# Altium PCB InstallGuide.PcbDoc (part 1 of 2)
Units mil, origin at the board's own origin, x right, y up, seen from the top; angles counter-clockwise.
Board outline 6000 x 4000 mil, 2 copper layers (Top Layer, Bottom Layer); 26 components, 17 nets, 116 pads, 67 vias.
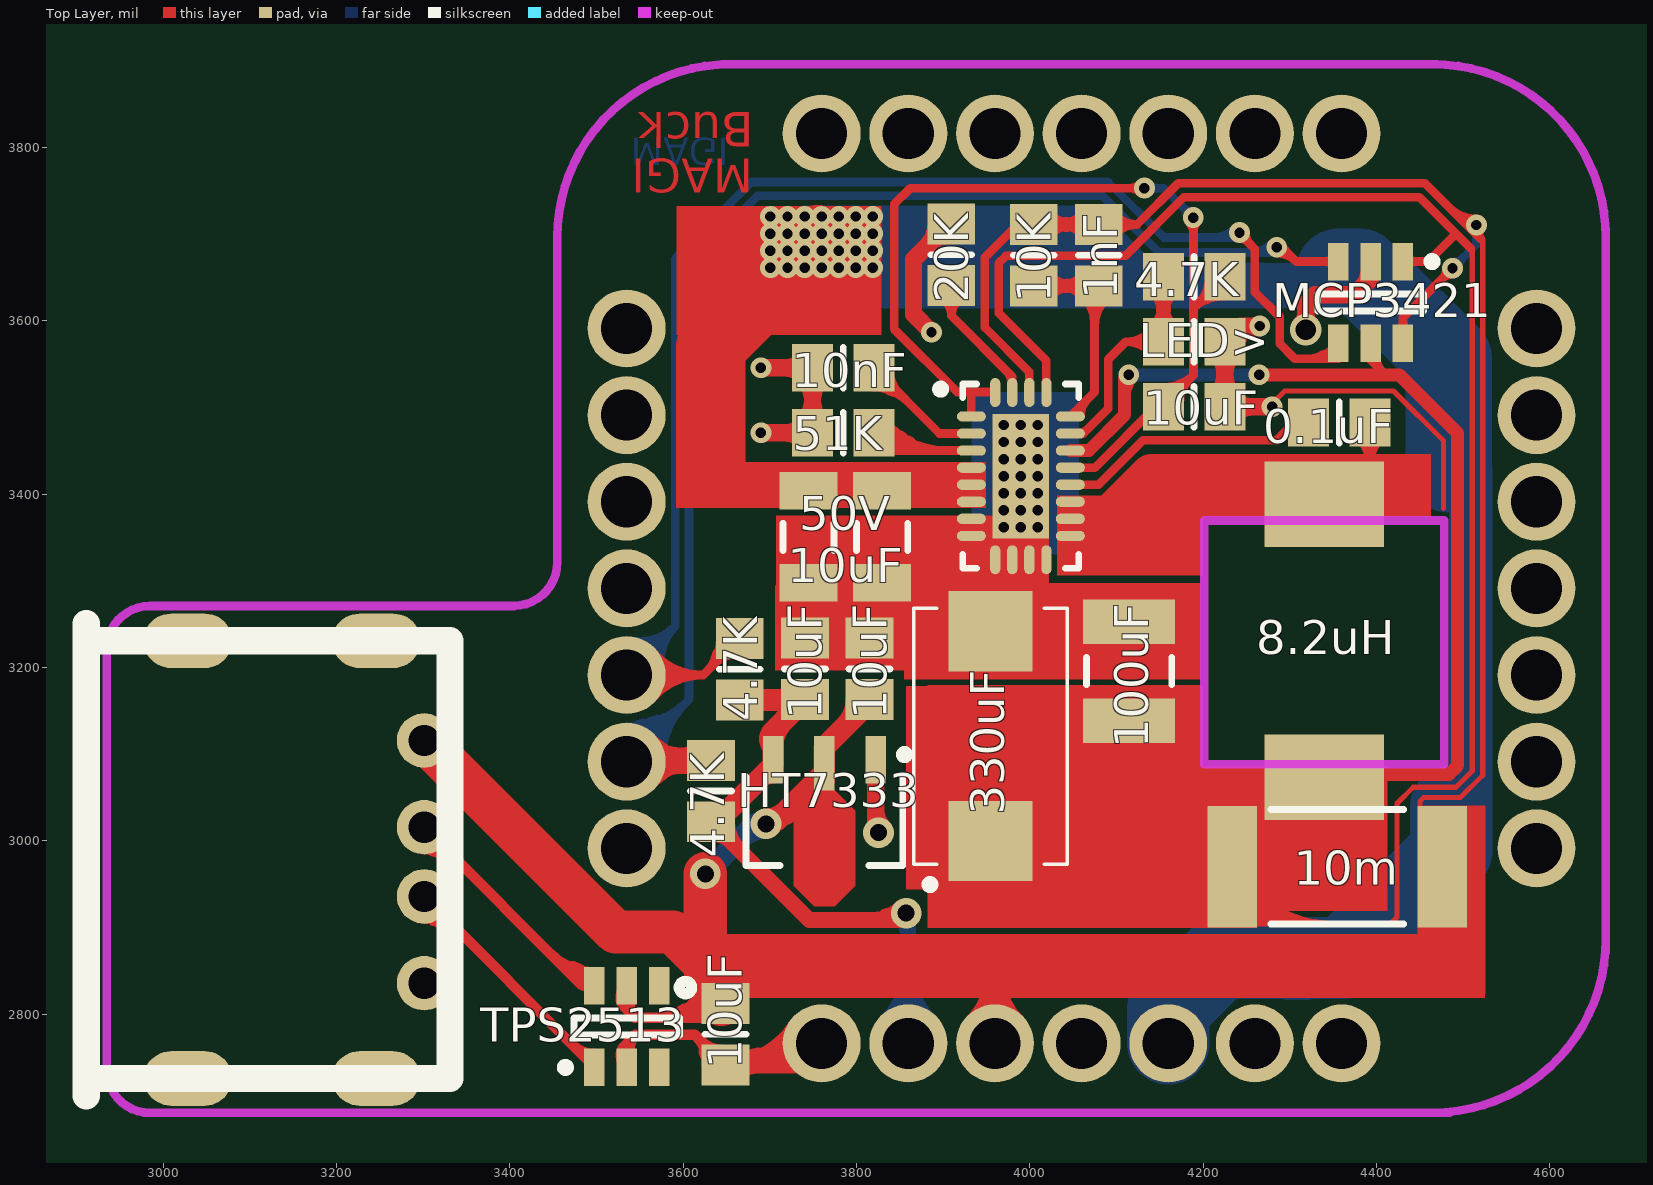
[diagram p0: Top Layer view]
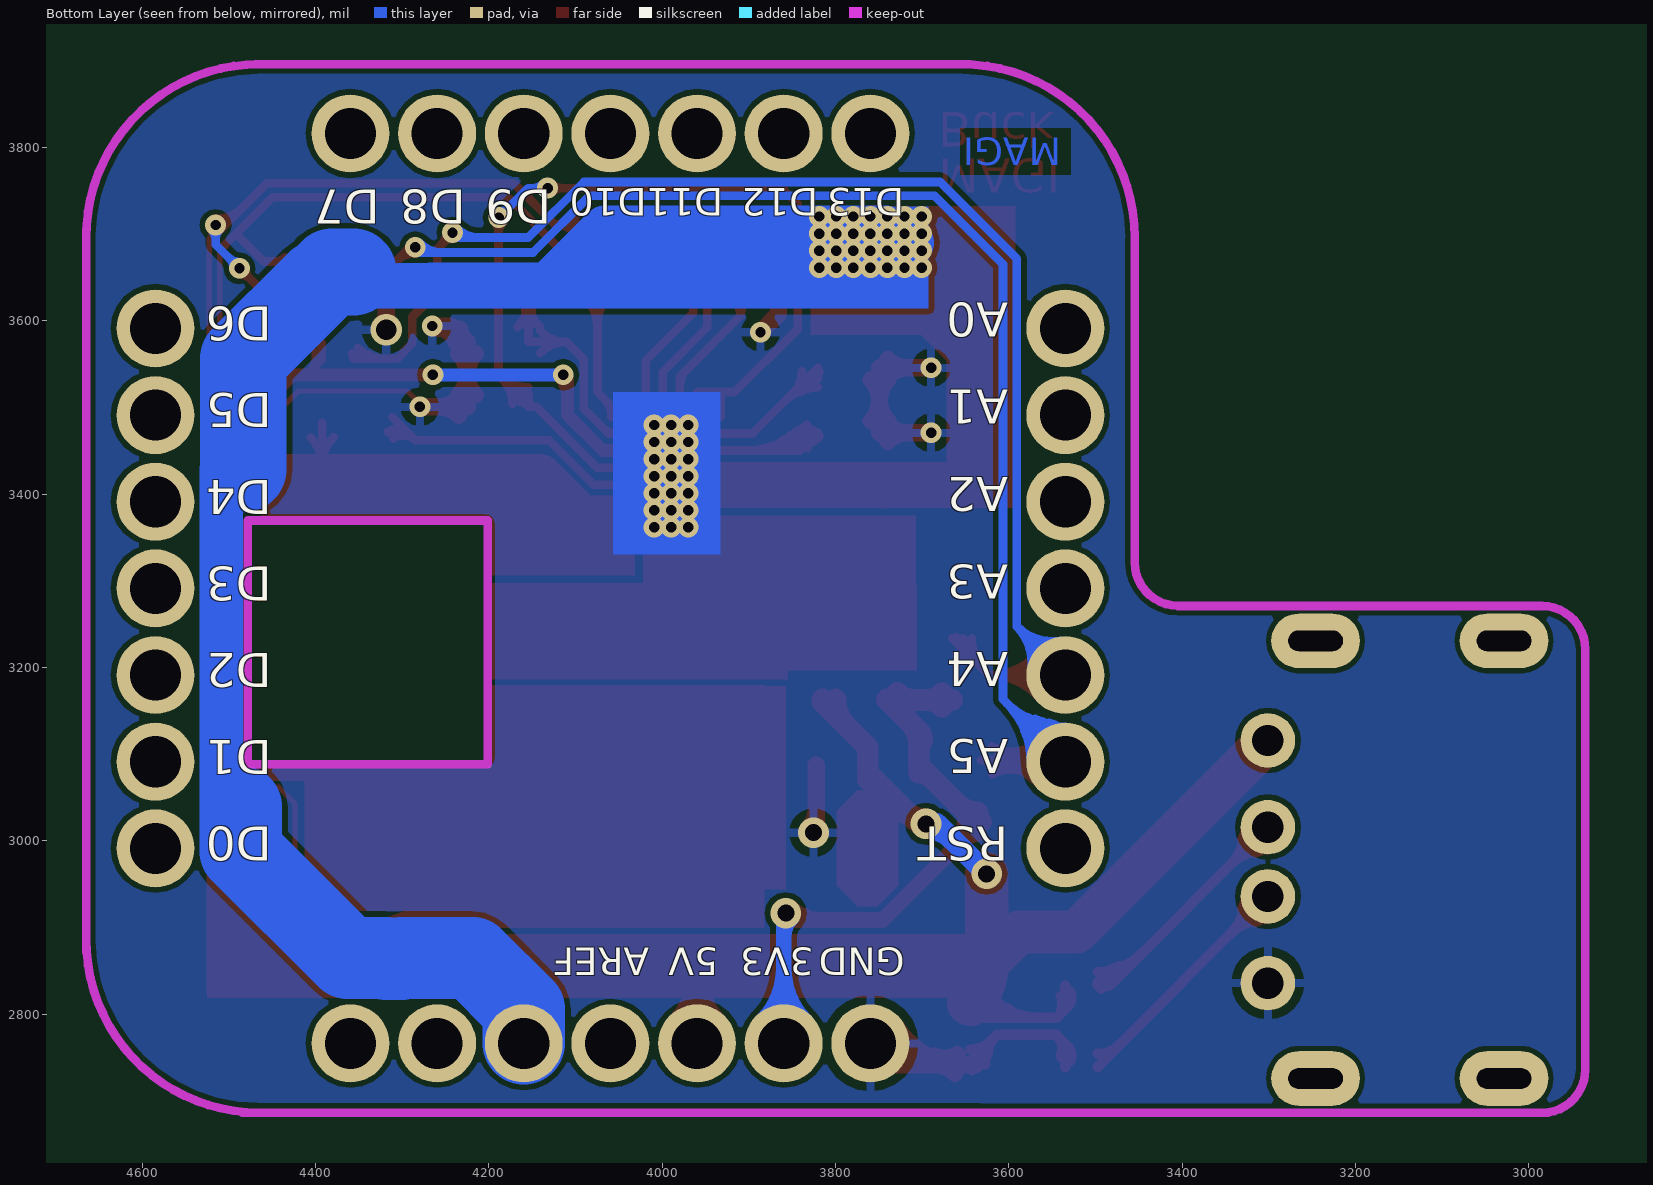
[diagram p1: Bottom Layer view, seen from below]

## Layer stack, top to bottom
Top Solder: solder mask 0.4, Solder Resist, Dk 3.5
Top Layer: signal copper 1.4
Dielectric 1: dielectric 12.6, FR-4, Dk 4.8
Bottom Layer: signal copper 1.4
Bottom Solder: solder mask 0.4, Solder Resist, Dk 3.5

## Board outline
1000,1000 7000,1000 7000,5000 1000,5000

## Design rules (kind name [scope] priority, off if disabled: settings)
Clearance [All] p1: gap=6
PolygonConnect [All] p1: connectstyle=Relief reliefconductorwidth=10 reliefentries=4 polygonreliefangle="90 Angle" airgapwidth=10
RoutingVias [All] p1: holewidth=28 width=50 viastyle="Through Hole" minholewidth=12 minwidth=24 maxholewidth=280 maxwidth=500
SolderMaskExpansion [All] p1: expansion=4
Width [All] p1: maxlimit=100 minlimit=6 preferedwidth=10
29 further rules are at their usual default settings.

## Components (designator, comment, footprint, x,y, rotation, side; value= is the part's Value field where it differs from the comment)
C1 "0805" 6-0805_N 4189.72,3500.87 r180 top
C2 "0805" 6-0805_N 3784.72,3545.87 r180 top
C3 "0805" 6-0805_N 4079.72,3675.87 r270 top
C4 "1206" C1206 3744.72,3350.87 r90 top
C5 "1206" C1206 3829.72,3350.87 r90 top
C6 "0805" 6-0805_N 4357.09,3482.68 r180 top
C7 "CAP_1" 6TPE330M 3954.72,3120.87 r90 top
C8 "0805" C1210_N 4114.72,3195.87 r90 top
C9 "10uf" 6-0805_n 3815.04,3198.5 r90 top
C10 "10uf" 6-0805_n 3740.63,3198.5 r90 top
C11 "10uf" 6-0805_N 3648.82,2776.77 r270 top
D1 "LED_0805" 6-0805_n 4189.72,3575.87 r0 top
J1 "MAGIsBoard" MAGIsBoard 4059.84,3291.34 r180 top
J2 "USB1" USB-04A 3273.62,2978.35 r270 top
L1 "Inductor" 7*7 4349.72,3230.87 r270 top
R1 "RES1_1" 6-0805_n 3909.53,3676.46 r90 top
R2 "RES1_1" 6-0805_n 3784.72,3470.87 r180 top
R3 "RES1_1" 6-0805_n 4004.72,3675.87 r270 top
R4 "RES1_1" 2512 4354.8,2970.16 r0 top
R5 "RES1_1" 6-0805_n 4189.72,3650.87 r180 top
R6 "RES1_1" 6-0805_n 3632.28,3057.48 r270 top
R7 "RES1_1" 6-0805_n 3665.35,3198.03 r270 top
U1 "LT8697" lt8697 3989.72,3420.87 r0 top
U2 "HS7333" HS7333 3762.99,3022.83 r270 top
U3 "TPS2513" TPS2513 3535.04,2785.83 r90 top
U4 "MCP3421" tps2513 4393.31,3621.26 r270 top

## Footprints (in the part's own frame and the unit in brackets; to place one, negate y for a bottom-side part, rotate by r counter-clockwise, add the part's x,y. Pads: shape width x height; smd on the part's side, far side on the other; paste and mask are expansions set on the pad)
6-0805_N [mm] "Chip Resistor, Body 2.0x1.2mm, IPC Medium Density"
  rect 1.2x1.4 smd: 1(-0.9,0) 2(0.9,0)
  silkscreen extent 0,-0.6 0,0.6, body extent -1.07,-0.7 1.07,0.7, height 0.7
6-0805_n [mm] "Chip Resistor, Body 2.0x1.2mm, IPC Medium Density"
  rect 1.2x1.4 smd: 1(-0.9,0) 2(0.9,0)
  silkscreen extent 0,-0.6 0,0.6, body extent -1.07,-0.7 1.07,0.7, height 0.7
6TPE330M [mm] "Molded Capacitor, 2-Leads, Body 7.30x4.30mm, IPC Medium Density"
  rect 2.35x2.45 smd: 1(-3.075,0) 2(3.075,0)
  silkscreen extent -4.47,-2.25 3.75,2.25, body extent -3.75,-2.25 3.75,2.25, height 2
7*7 [mil]
  rect 98.43x137.8 smd: 1(-157.5,-10) 2(157.5,-10)
2512 [mm]
  rect 1.45x3.55 smd: 1(-3.075,0) 2(3.075,0)
  silkscreen extent -1.95,-1.68 1.95,1.68, body extent -3.22,-1.7 3.22,1.7, height 0.65
C1206 [mm] "Chip Capacitor, Body 3.2x1.6mm, IPC High Density"
  rect 1.1x1.7 smd: 1(-1.35,0) 2(1.35,0)
  silkscreen extent -0.4,-0.75 0.4,0.75, body extent -1.7,-0.9 1.7,0.9, height 1.3
C1210_N [mm] "Chip Capacitor, Body 3.2x2.5mm, IPC Medium Density"
  rect 1.3x2.7 smd: 1(-1.45,0) 2(1.45,0)
  silkscreen extent -0.4,-1.25 0.4,1.25, body extent -1.7,-1.35 1.7,1.35, height 1.5
HS7333 [mm] "SOT89, 3-Leads, Body 4.50x2.50mm, Pitch 1.50mm, Lead Span 4.1mm, IPC Medium Density"
  rect 1.4x0.6 smd: 1(-1.8,1.5) 3(-1.8,-1.5)
  rect 1.6x0.6 smd: 2(-1.7,0)
  Top Layer region: -0.9,0.3 -0.3,0.9 1.9,0.9 2.5,0.3 2.5,-0.3 1.9,-0.9 -0.3,-0.9 -0.9,-0.3
  silkscreen extent -2.07,-2.3 1.3,2.48, body extent -1.3,-2.3 1.3,2.3, height 1.6
lt8697 [mm] "QFN, 24-Leads, Body 3.00x5.00mm, Pitch 0.50mm, Thermal Pad 1.65x3.65mm, IPC Medium Density"
  oval 0.85x0.3 smd: 1(-1.45,1.75) 2(-1.45,1.25) 3(-1.45,0.75) 4(-1.45,0.25) 5(-1.45,-0.25) 6(-1.45,-0.75) 7(-1.45,-1.25) 8(-1.45,-1.75) 13(1.45,-1.75) 14(1.45,-1.25) 15(1.45,-0.75) 16(1.45,-0.25) 17(1.45,0.25) 18(1.45,0.75) 19(1.45,1.25) 20(1.45,1.75)
  oval 0.3x0.85 smd: 9(-0.75,-2.45) 10(-0.25,-2.45) 11(0.25,-2.45) 12(0.75,-2.45) 21(0.75,2.45) 22(0.25,2.45) 23(-0.25,2.45) 24(-0.75,2.45)
  rect 1.65x3.65 smd: 25(0,0)
  silkscreen extent -2.47,-2.7 1.7,2.7, body extent -1.55,-2.55 1.55,2.55, height 0.8
MAGIsBoard [mil]
  round 90 hole 59.06: 1(300,525) 2(200,525) 3(100,525) 4(0,525) 5(-100,525) 6(-200,525) 7(-300,525) 8(-525,300) 9(-525,200) 10(-525,100) 11(-525,0) 12(-525,-100) 13(-525,-200) 14(-525,-300) 15(-300,-525) 16(-200,-525) 17(-100,-525) 18(0,-525) 19(100,-525) 20(200,-525) 21(300,-525) 22(525,-300) 23(525,-200) 24(525,-100) 25(525,0) 26(525,100) 27(525,200) 28(525,300)
  Keep-Out Layer lines w10: 605,-405 cw(c405,-405) 405,-605 ; 425,605 -425,605 ; 415,-605 -410,-605 ; -405,605 ccw(c-405,405) -605,405 ; -405,-605 cw(c-405,-405) -605,-405 ; -605,420 -605,290 -605,-415
  silkscreen extent 450,454 464,468
TPS2513 [mm]
  rect 1.1x0.6 smd: 1(-1.2,0.95) 2(-1.2,0) 3(-1.2,-0.95) 4(1.2,-0.95) 5(1.2,0) 6(1.2,0.95)
  silkscreen extent -1.32,-1.55 0.25,1.92, body extent -0.87,-1.52 0.87,1.53, height 1.45
tps2513 [mm]
  rect 1.1x0.6 smd: 1(-1.2,0.95) 2(-1.2,0) 3(-1.2,-0.95) 4(1.2,-0.95) 5(1.2,0) 6(1.2,0.95)
  silkscreen extent -1.32,-1.55 0.25,1.93, body extent -0.87,-1.52 0.87,1.53, height 1.45
USB-04A [mm]
  oval 1.6x2.6 hole 0.6 slot 1.6 at 90 deg: 0(-6.413,-0.699) 0(-6.413,-6.223) 0(6.413,-0.698) 0(6.414,-6.223)
  round 1.6 hole 0.92: 1(-3.492,0.698) 2(-0.953,0.698) 3(1.079,0.699) 4(3.619,0.699)
  silkscreen extent -6.92,-9.21 6.92,1.46

## Part data
C1 C2 C3 C4 C5 C6 C8: library part CAP_1, "Capacitor"
C7: "Capacitor"
C9 C10 C11: library part "CAPACITOR POL", "Capacitor"
D1: "LED"

## Via types
v1: diameter 24, hole 12, Top Layer to Bottom Layer, 62 vias
v2: diameter 35.43, hole 19.68, Top Layer to Bottom Layer, 4 vias
v3: diameter 36, hole 24, Top Layer to Bottom Layer, 1 vias

## Nets (pads, with @x,y where several pads share a name; then routed paths per layer and width w, separated by ;. In a path a pad name is that pad's centre, name@x,y a point inside that pad or via, vN(x,y) a via of type N, cw(c..) or ccw(c..) an arc to the next point about the centre after c; other vN are vias at no path point)
3.3V: C10.1 J1.2 R6.2 R7.2 U2.3 | length 2120
  Top Layer w18: R6.2@3632.28,3022.05 3745.67,2908.66 3849.6,2908.66 v2(3857.47,2916.53) ; R6.2@3636.22,3007.43 cw(c3636.22,2981.63) R6.2@3654.46,2999.87 ; R6.2@3636.22,3007.43 cw(c3636.22,2981.63) R6.2@3654.46,2999.87 ; R6.2@3636.22,3007.43 cw(c3636.22,2981.63) R6.2@3654.46,2999.87 ; R6.2@3650.84,3022.05 ccw(c3695.65,3022.05) 3663.97,2990.36 ; R6.2@3650.84,3022.05 ccw(c3695.65,3022.05) 3663.97,2990.36 ; R6.2@3650.84,3022.05 ccw(c3695.65,3022.05) 3663.97,2990.36 ; 3817.43,2908.66 ccw(c3817.43,2956.57) v2@3851.31,2922.69 ; 3817.43,2908.66 ccw(c3817.43,2956.57) v2@3851.31,2922.69 ; 3817.43,2908.66 ccw(c3817.43,2956.57) v2@3851.31,2922.69 ; 3834.04,2912.72 cw(c3841.15,2900.41) v2@3851.27,2910.4 ; 3834.04,2912.72 cw(c3841.15,2900.41) v2@3851.27,2910.4 ; 3834.04,2912.72 cw(c3841.15,2900.41) v2@3851.27,2910.4
  Top Layer w25: R6.2@3632.28,3022.05 3638.76,3022.05 3704.02,3087.3 3704.02,3126.46 ; R7.2@3665.35,3162.6 C10.1@3740.16,3162.6 ; C10.1@3740.63,3163.07 C10.1@3740.16,3162.6 ; R6.2@3636.22,3033.17 ccw(c3636.22,3066.15) R6.2@3659.54,3042.83 ; R6.2@3636.22,3033.17 ccw(c3636.22,3066.15) R6.2@3659.54,3042.83 ; R6.2@3636.22,3033.17 ccw(c3636.22,3066.15) R6.2@3659.54,3042.83 ; R7.2@3677.16,3154.73 cw(c3696.14,3135.75) 3696.14,3162.6 ; R7.2@3677.16,3154.73 cw(c3696.14,3135.75) 3696.14,3162.6 ; R7.2@3677.16,3154.73 cw(c3696.14,3135.75) 3696.14,3162.6 ; R7.2@3677.16,3170.46 ccw(c3696.14,3189.45) 3696.14,3162.6 ; R7.2@3677.16,3170.46 ccw(c3696.14,3189.45) 3696.14,3162.6 ; R7.2@3677.16,3170.46 ccw(c3696.14,3189.45) 3696.14,3162.6 ; 3689.29,3072.57 cw(c3703.94,3057.93) U2.3@3703.94,3078.64 ; 3689.29,3072.57 cw(c3703.94,3057.93) U2.3@3703.94,3078.64 ; 3689.29,3072.57 cw(c3703.94,3057.93) U2.3@3703.94,3078.64 ; U2.3@3703.25,3109.45 cw(c3742.46,3109.45) 3714.73,3137.17 ; U2.3@3703.25,3109.45 cw(c3742.46,3109.45) 3714.73,3137.17 ; U2.3@3703.25,3109.45 cw(c3742.46,3109.45) 3714.73,3137.17 ; U2.3@3703.42,3109 cw(c3713.07,3117.41) 3704.02,3126.46 ; U2.3@3703.42,3109 cw(c3713.07,3117.41) 3704.02,3126.46 ; U2.3@3703.42,3109 cw(c3713.07,3117.41) 3704.02,3126.46 ; 3704.02,3126.46 C10.1@3740.16,3162.6 ; 3708.7,3162.6 ccw(c3708.7,3191.06) C10.1@3728.83,3170.94 ; 3708.7,3162.6 ccw(c3708.7,3191.06) C10.1@3728.83,3170.94 ; 3708.7,3162.6 ccw(c3708.7,3191.06) C10.1@3728.83,3170.94 ; 3710.98,3162.6 cw(c3710.98,3137.36) C10.1@3728.83,3155.21 ; 3710.98,3162.6 cw(c3710.98,3137.36) C10.1@3728.83,3155.21 ; 3710.98,3162.6 cw(c3710.98,3137.36) C10.1@3728.83,3155.21 ; 3714.92,3137.36 ccw(c3689.22,3163.07) C10.1@3725.57,3163.07 ; 3714.92,3137.36 ccw(c3689.22,3163.07) C10.1@3725.57,3163.07 ; 3714.92,3137.36 ccw(c3689.22,3163.07) C10.1@3725.57,3163.07
  Bottom Layer w18: v2(3857.47,2916.53) 3859.84,2914.16 J1.2@3859.84,2766.34 ; J1.2@3834.39,2791.79 ccw(c3772.93,2853.25) 3859.84,2853.25 ; J1.2@3834.39,2791.79 ccw(c3772.93,2853.25) 3859.84,2853.25 ; J1.2@3834.39,2791.79 ccw(c3772.93,2853.25) 3859.84,2853.25 ; v2@3851.31,2910.37 cw(c3830.71,2889.76) 3859.84,2889.76 ; v2@3851.31,2910.37 cw(c3830.71,2889.76) 3859.84,2889.76 ; v2@3851.31,2910.37 cw(c3830.71,2889.76) 3859.84,2889.76 ; 3859.84,2853.25 ccw(c3946.75,2853.25) J1.2@3885.3,2791.79 ; 3859.84,2853.25 ccw(c3946.75,2853.25) J1.2@3885.3,2791.79 ; 3859.84,2853.25 ccw(c3946.75,2853.25) J1.2@3885.3,2791.79
DM1: J2.2 U3.6 | length 1684.4
  Top Layer w12: J2.2@3301.12,3015.85 3483.9,2833.07 ; 3480.46,2852.16 ccw(c3491.19,2862.89) U3.6@3495.85,2848.44 ; U3.6@3497.64,2833.07 3483.9,2833.07 ; J2.2@3290.83,3013.74 ccw(c3326.16,3020.97) 3316.82,2986.14 ; J2.2@3290.83,3013.74 ccw(c3326.16,3020.97) 3316.82,2986.14 ; J2.2@3290.83,3013.74 ccw(c3326.16,3020.97) 3316.82,2986.14 ; J2.2@3300.82,3014.38 cw(c3291.64,2969.54) 3335.85,2981.39 ; J2.2@3300.82,3014.38 cw(c3291.64,2969.54) 3335.85,2981.39 ; J2.2@3300.82,3014.38 cw(c3291.64,2969.54) 3335.85,2981.39 ; J2.2@3301.12,2990.35 cw(c3301.12,2928.8) 3344.65,2972.32 ; J2.2@3301.12,2990.35 cw(c3301.12,2928.8) 3344.65,2972.32 ; J2.2@3301.12,2990.35 cw(c3301.12,2928.8) 3344.65,2972.32 ; J2.2@3301.12,3002.35 cw(c3301.12,2969.77) 3324.16,2992.81 ; J2.2@3301.12,3002.35 cw(c3301.12,2969.77) 3324.16,2992.81 ; J2.2@3301.12,3002.35 cw(c3301.12,2969.77) 3324.16,2992.81 ; J2.2@3302.59,3016.15 ccw(c3347.43,3025.33) 3335.58,2981.12 ; J2.2@3302.59,3016.15 ccw(c3347.43,3025.33) 3335.58,2981.12 ; J2.2@3302.59,3016.15 ccw(c3347.43,3025.33) 3335.58,2981.12 ; J2.2@3303.23,3026.14 cw(c3296,2990.81) 3330.83,3000.14 ; J2.2@3303.23,3026.14 cw(c3296,2990.81) 3330.83,3000.14 ; J2.2@3303.23,3026.14 cw(c3296,2990.81) 3330.83,3000.14 ; J2.2@3314.62,3015.85 ccw(c3347.2,3015.85) 3324.16,2992.81 ; J2.2@3314.62,3015.85 ccw(c3347.2,3015.85) 3324.16,2992.81 ; J2.2@3314.62,3015.85 ccw(c3347.2,3015.85) 3324.16,2992.81 ; J2.2@3326.62,3015.85 ccw(c3388.17,3015.85) 3344.65,2972.32 ; J2.2@3326.62,3015.85 ccw(c3388.17,3015.85) 3344.65,2972.32 ; J2.2@3326.62,3015.85 ccw(c3388.17,3015.85) 3344.65,2972.32 ; 3447.46,2869.51 ccw(c3497.64,2919.69) U3.6@3497.64,2848.72 ; 3447.46,2869.51 ccw(c3497.64,2919.69) U3.6@3497.64,2848.72 ; 3447.46,2869.51 ccw(c3497.64,2919.69) U3.6@3497.64,2848.72 ; 3467.95,2849.02 ccw(c3497.64,2878.72) U3.6@3497.64,2836.72 ; 3467.95,2849.02 ccw(c3497.64,2878.72) U3.6@3497.64,2836.72 ; 3467.95,2849.02 ccw(c3497.64,2878.72) U3.6@3497.64,2836.72 ; 3472.45,2855.47 cw(c3463.86,2823.41) U3.6@3492.61,2840.01 ; 3472.45,2855.47 cw(c3463.86,2823.41) U3.6@3492.61,2840.01 ; 3472.45,2855.47 cw(c3463.86,2823.41) U3.6@3492.61,2840.01 ; 3483.9,2833.07 cw(c3483.9,2819.73) U3.6@3493.47,2829.02 ; 3483.9,2833.07 ccw(c3483.9,2846.41) U3.6@3493.47,2837.12 ; 3483.9,2833.07 cw(c3483.9,2819.73) U3.6@3493.47,2829.02 ; 3483.9,2833.07 ccw(c3483.9,2846.41) U3.6@3493.47,2837.12 ; 3483.9,2833.07 cw(c3483.9,2819.73) U3.6@3493.47,2829.02 ; 3483.9,2833.07 ccw(c3483.9,2846.41) U3.6@3493.47,2837.12
DP1: J2.3 U3.1 | length 1350.6
  Top Layer w12: J2.3@3301.12,2935.85 3497.64,2739.33 U3.1@3497.64,2738.58 ; J2.3@3290.83,2933.74 ccw(c3326.16,2940.97) 3316.82,2906.14 ; J2.3@3290.83,2933.74 ccw(c3326.16,2940.97) 3316.82,2906.14 ; J2.3@3290.83,2933.74 ccw(c3326.16,2940.97) 3316.82,2906.14 ; J2.3@3300.82,2934.38 cw(c3291.64,2889.54) 3335.85,2901.39 ; J2.3@3300.82,2934.38 cw(c3291.64,2889.54) 3335.85,2901.39 ; J2.3@3300.82,2934.38 cw(c3291.64,2889.54) 3335.85,2901.39 ; J2.3@3301.12,2910.35 cw(c3301.12,2848.8) 3344.65,2892.32 ; J2.3@3301.12,2910.35 cw(c3301.12,2848.8) 3344.65,2892.32 ; J2.3@3301.12,2910.35 cw(c3301.12,2848.8) 3344.65,2892.32 ; J2.3@3301.12,2922.35 cw(c3301.12,2889.77) 3324.16,2912.81 ; J2.3@3301.12,2922.35 cw(c3301.12,2889.77) 3324.16,2912.81 ; J2.3@3301.12,2922.35 cw(c3301.12,2889.77) 3324.16,2912.81 ; J2.3@3302.59,2936.15 ccw(c3347.43,2945.33) 3335.58,2901.12 ; J2.3@3302.59,2936.15 ccw(c3347.43,2945.33) 3335.58,2901.12 ; J2.3@3302.59,2936.15 ccw(c3347.43,2945.33) 3335.58,2901.12 ; J2.3@3303.23,2946.14 cw(c3296,2910.81) 3330.83,2920.14 ; J2.3@3303.23,2946.14 cw(c3296,2910.81) 3330.83,2920.14 ; J2.3@3303.23,2946.14 cw(c3296,2910.81) 3330.83,2920.14 ; J2.3@3314.62,2935.85 ccw(c3347.2,2935.85) 3324.16,2912.81 ; J2.3@3314.62,2935.85 ccw(c3347.2,2935.85) 3324.16,2912.81 ; J2.3@3314.62,2935.85 ccw(c3347.2,2935.85) 3324.16,2912.81 ; J2.3@3326.62,2935.85 ccw(c3388.17,2935.85) 3344.65,2892.32 ; J2.3@3326.62,2935.85 ccw(c3388.17,2935.85) 3344.65,2892.32 ; J2.3@3326.62,2935.85 ccw(c3388.17,2935.85) 3344.65,2892.32 ; 3472.19,2764.78 ccw(c3497.64,2790.22) U3.1@3497.64,2754.24 ; 3472.19,2764.78 ccw(c3497.64,2790.22) U3.1@3497.64,2754.24 ; 3472.19,2764.78 ccw(c3497.64,2790.22) U3.1@3497.64,2754.24
GND: C1.1 C2.2 C4.1 C5.1 C7.2 C8.2 C9.2 C10.2 C11.2 D1.2 J1.1 J2.4 R1.2 R2.2 U1.7 U1.8 U1.9 U1.10 U1.11 U1.12 U1.25 U2.1 U3.2 U4.2 | length 5637.9
  Top Layer w6: v1(4279.72,3500.87) 4279.72,3504.66 4294.3,3519.24 4419.87,3519.24 4477.39,3461.71 4477.39,3383.68
  Top Layer w10: C1.1@4225.16,3515.87 D1.2@4225.16,3565.87 ; C1.1@4211.99,3517.97 ccw(c4180.2,3549.76) D1.2@4225.16,3549.76 ; C1.1@4211.99,3517.97 ccw(c4180.2,3549.76) D1.2@4225.16,3549.76 ; C1.1@4211.99,3517.97 ccw(c4180.2,3549.76) D1.2@4225.16,3549.76 ; D1.2@4211.99,3558.76 cw(c4180.2,3526.97) C1.1@4225.16,3526.97 ; D1.2@4211.99,3558.76 cw(c4180.2,3526.97) C1.1@4225.16,3526.97 ; D1.2@4211.99,3558.76 cw(c4180.2,3526.97) C1.1@4225.16,3526.97 ; C1.1@4214.49,3520.07 ccw(c4203.99,3535.1) 4221.71,3539.85 ; C1.1@4214.49,3520.07 ccw(c4203.99,3535.1) 4221.71,3539.85 ; C1.1@4214.49,3520.07 ccw(c4203.99,3535.1) 4221.71,3539.85 ; D1.2@4214.49,3556.66 cw(c4203.99,3541.63) 4221.71,3536.88 ; D1.2@4214.49,3556.66 cw(c4203.99,3541.63) 4221.71,3536.88 ; D1.2@4214.49,3556.66 cw(c4203.99,3541.63) 4221.71,3536.88 ; D1.2@4214.49,3556.66 cw(c4203.99,3541.63) 4221.71,3536.88 ; D1.2@4214.49,3556.66 cw(c4203.99,3541.63) 4221.71,3536.88 ; D1.2@4214.49,3556.66 cw(c4203.99,3541.63) 4221.71,3536.88 ; C1.1@4215.85,3520.93 ccw(c4203.16,3542.9) 4227.67,3536.33 ; C1.1@4215.85,3520.93 ccw(c4203.16,3542.9) 4227.67,3536.33 ; C1.1@4215.85,3520.93 ccw(c4203.16,3542.9) 4227.67,3536.33 ; D1.2@4215.85,3555.8 cw(c4203.16,3533.83) 4227.67,3540.4 ; D1.2@4215.85,3555.8 cw(c4203.16,3533.83) 4227.67,3540.4 ; D1.2@4215.85,3555.8 cw(c4203.16,3533.83) 4227.67,3540.4 ; D1.2@4215.85,3555.8 cw(c4203.16,3533.83) 4227.67,3540.4 ; D1.2@4215.85,3555.8 cw(c4203.16,3533.83) 4227.67,3540.4 ; D1.2@4215.85,3555.8 cw(c4203.16,3533.83) 4227.67,3540.4 ; 4222.65,3536.33 ccw(c4247.15,3542.9) C1.1@4234.47,3520.93 ; 4222.65,3536.33 ccw(c4247.15,3542.9) C1.1@4234.47,3520.93 ; 4222.65,3536.33 ccw(c4247.15,3542.9) C1.1@4234.47,3520.93 ; 4222.65,3540.4 cw(c4247.15,3533.83) D1.2@4234.47,3555.8 ; 4222.65,3540.4 cw(c4247.15,3533.83) D1.2@4234.47,3555.8 ; 4222.65,3540.4 cw(c4247.15,3533.83) D1.2@4234.47,3555.8 ; 4222.65,3540.4 cw(c4247.15,3533.83) D1.2@4234.47,3555.8 ; 4222.65,3540.4 cw(c4247.15,3533.83) D1.2@4234.47,3555.8 ; 4222.65,3540.4 cw(c4247.15,3533.83) D1.2@4234.47,3555.8 ; C1.1@4225.16,3526.97 cw(c4270.11,3526.97) D1.2@4238.33,3558.76 ; C1.1@4225.16,3526.97 cw(c4270.11,3526.97) D1.2@4238.33,3558.76 ; C1.1@4225.16,3526.97 cw(c4270.11,3526.97) D1.2@4238.33,3558.76 ; D1.2@4225.16,3549.76 ccw(c4270.11,3549.76) C1.1@4238.33,3517.97 ; D1.2@4225.16,3549.76 ccw(c4270.11,3549.76) C1.1@4238.33,3517.97 ; D1.2@4225.16,3549.76 ccw(c4270.11,3549.76) C1.1@4238.33,3517.97 ; 4228.61,3536.88 cw(c4246.32,3541.63) D1.2@4235.82,3556.66 ; 4228.61,3536.88 cw(c4246.32,3541.63) D1.2@4235.82,3556.66 ; 4228.61,3536.88 cw(c4246.32,3541.63) D1.2@4235.82,3556.66 ; 4228.61,3536.88 cw(c4246.32,3541.63) D1.2@4235.82,3556.66 ; 4228.61,3536.88 cw(c4246.32,3541.63) D1.2@4235.82,3556.66 ; 4228.61,3536.88 cw(c4246.32,3541.63) D1.2@4235.82,3556.66 ; 4228.61,3539.85 ccw(c4246.32,3535.1) C1.1@4235.82,3520.07 ; 4228.61,3539.85 ccw(c4246.32,3535.1) C1.1@4235.82,3520.07 ; 4228.61,3539.85 ccw(c4246.32,3535.1) C1.1@4235.82,3520.07
  Top Layer w12: U3.2@3535.04,2738.58 3535.04,2766.14 3545.28,2776.38 ; C11.2@3648.82,2741.34 3613.78,2776.38 ; U3.2@3529.36,2745.97 cw(c3544.26,2752.41) 3532.78,2763.88 ; U3.2@3529.36,2745.97 cw(c3544.26,2752.41) 3532.78,2763.88 ; U3.2@3529.36,2745.97 cw(c3544.26,2752.41) 3532.78,2763.88 ; U3.2@3530.93,2752.53 ccw(c3521.01,2762.45) 3535.04,2762.45 ; U3.2@3530.93,2752.53 ccw(c3521.01,2762.45) 3535.04,2762.45 ; U3.2@3530.93,2752.53 ccw(c3521.01,2762.45) 3535.04,2762.45 ; 3535.04,2762.45 ccw(c3549.07,2762.45) U3.2@3539.15,2752.53 ; 3535.04,2762.45 ccw(c3549.07,2762.45) U3.2@3539.15,2752.53 ; 3535.04,2762.45 ccw(c3549.07,2762.45) U3.2@3539.15,2752.53 ; U3.2@3540.37,2750.73 cw(c3561.71,2759.95) 3545.28,2776.38 ; U3.2@3540.37,2750.73 cw(c3561.71,2759.95) 3545.28,2776.38 ; U3.2@3540.37,2750.73 cw(c3561.71,2759.95) 3545.28,2776.38 ; 3545.28,2776.38 3613.78,2776.38 ; 3613.78,2776.38 cw(c3581.13,2743.73) C11.2@3627.27,2742 ; 3613.78,2776.38 cw(c3581.13,2743.73) C11.2@3627.27,2742 ; 3613.78,2776.38 cw(c3581.13,2743.73) C11.2@3627.27,2742 ; 3621.52,2768.64 ccw(c3644.88,2792) C11.2@3644.88,2758.96 ; 3621.52,2768.64 ccw(c3644.88,2792) C11.2@3644.88,2758.96 ; 3621.52,2768.64 ccw(c3644.88,2792) C11.2@3644.88,2758.96 ; C11.2@3623.93,2756.67 ccw(c3652.94,2763.29) C11.2@3642.68,2735.35 ; C11.2@3623.93,2756.67 ccw(c3652.94,2763.29) C11.2@3642.68,2735.35 ; C11.2@3623.93,2756.67 ccw(c3652.94,2763.29) C11.2@3642.68,2735.35
  Top Layer w20: v1(3689.72,3470.87) R2.2@3749.29,3470.87 C2.2@3749.29,3545.87 v1(3689.72,3545.87) ; J1.1@3759.84,2766.34 3734.84,2741.34 C11.2@3648.82,2741.34 ; U2.1@3822.13,3087.48 3822.13,3021.57 3829.92,3013.78 v2(3825.59,3009.45) v2@3823.23,3009.45 ; v1(3886.61,3587.01) 3865.97,3607.65 3865.97,3671.27 3906.58,3711.89 R1.2@3909.53,3711.89 ; R1.2@3909.72,3711.3 R1.2@3919.72,3701.3 ; D1.2@4225.16,3565.87 C1.1@4225.16,3500.87 v1(4279.72,3500.87) ; v3(4318.5,3589.76) 4318.5,3619.68 4329.21,3630.39 4374.8,3630.39 4393.31,3648.9 U4.2@4393.31,3668.5 ; C11.2@3648.82,2741.34 ccw(c3648.82,2839.05) J1.1@3730.56,2785.51 ; C11.2@3648.82,2741.34 ccw(c3648.82,2839.05) J1.1@3730.56,2785.51 ; C11.2@3648.82,2741.34 ccw(c3648.82,2839.05) J1.1@3730.56,2785.51 ; C11.2@3659.57,2753.14 ccw(c3674.27,2778.61) 3681.89,2750.2 ; C11.2@3659.57,2753.14 ccw(c3674.27,2778.61) 3681.89,2750.2 ; C11.2@3659.57,2753.14 ccw(c3674.27,2778.61) 3681.89,2750.2 ; C11.2@3662.39,2731.71 cw(c3685.64,2708.45) 3685.64,2741.34 ; C11.2@3662.39,2731.71 cw(c3685.64,2708.45) 3685.64,2741.34 ; C11.2@3662.39,2731.71 cw(c3685.64,2708.45) 3685.64,2741.34 ; C11.2@3662.39,2750.97 ccw(c3685.64,2774.22) 3685.64,2741.34 ; C11.2@3662.39,2750.97 ccw(c3685.64,2774.22) 3685.64,2741.34 ; C11.2@3662.39,2750.97 ccw(c3685.64,2774.22) 3685.64,2741.34 ; C11.2@3664.55,2734.53 cw(c3696.04,2716.35) 3686.63,2751.47 ; C11.2@3664.55,2734.53 cw(c3696.04,2716.35) 3686.63,2751.47 ; C11.2@3664.55,2734.53 cw(c3696.04,2716.35) 3686.63,2751.47 ; 3685.83,2741.34 ccw(c3685.83,2814.81) J1.1@3747.29,2774.56 ; 3685.83,2741.34 ccw(c3685.83,2814.81) J1.1@3747.29,2774.56 ; 3685.83,2741.34 ccw(c3685.83,2814.81) J1.1@3747.29,2774.56 ; 3716.4,3470.87 cw(c3716.4,3437.98) R2.2@3739.66,3461.23 ; 3716.4,3470.87 ccw(c3716.4,3503.75) R2.2@3739.66,3480.5 ; 3716.4,3470.87 cw(c3716.4,3437.98) R2.2@3739.66,3461.23 ; 3716.4,3470.87 ccw(c3716.4,3503.75) R2.2@3739.66,3480.5 ; 3716.4,3470.87 cw(c3716.4,3437.98) R2.2@3739.66,3461.23 ; 3716.4,3470.87 ccw(c3716.4,3503.75) R2.2@3739.66,3480.5 ; 3716.4,3545.87 cw(c3716.4,3512.98) C2.2@3739.66,3536.23 ; 3716.4,3545.87 ccw(c3716.4,3578.75) C2.2@3739.66,3555.5 ; 3716.4,3545.87 cw(c3716.4,3512.98) C2.2@3739.66,3536.23 ; 3716.4,3545.87 ccw(c3716.4,3578.75) C2.2@3739.66,3555.5 ; 3716.4,3545.87 cw(c3716.4,3512.98) C2.2@3739.66,3536.23 ; 3716.4,3545.87 ccw(c3716.4,3578.75) C2.2@3739.66,3555.5 ; R2.2@3739.66,3484.44 ccw(c3716.4,3507.69) 3749.29,3507.69 ; R2.2@3739.66,3484.44 ccw(c3716.4,3507.69) 3749.29,3507.69 ; R2.2@3739.66,3484.44 ccw(c3716.4,3507.69) 3749.29,3507.69 ; C2.2@3739.66,3532.3 cw(c3716.4,3509.04) 3749.29,3509.04 ; C2.2@3739.66,3532.3 cw(c3716.4,3509.04) 3749.29,3509.04 ; C2.2@3739.66,3532.3 cw(c3716.4,3509.04) 3749.29,3509.04 ; 3749.29,3507.69 ccw(c3782.18,3507.69) R2.2@3758.92,3484.44 ; 3749.29,3507.69 ccw(c3782.18,3507.69) R2.2@3758.92,3484.44 ; 3749.29,3507.69 ccw(c3782.18,3507.69) R2.2@3758.92,3484.44 ; 3749.29,3509.04 cw(c3782.18,3509.04) C2.2@3758.92,3532.3 ; 3749.29,3509.04 cw(c3782.18,3509.04) C2.2@3758.92,3532.3 ; 3749.29,3509.04 cw(c3782.18,3509.04) C2.2@3758.92,3532.3 ; 3822.13,3036.44 ccw(c3852.58,3036.44) v2@3831.05,3014.91 ; 3822.13,3036.44 ccw(c3852.58,3036.44) v2@3831.05,3014.91 ; 3822.13,3036.44 ccw(c3852.58,3036.44) v2@3831.05,3014.91 ; 3881.63,3686.94 ccw(c3856.68,3711.89) R1.2@3891.97,3711.89 ; 3881.63,3686.94 ccw(c3856.68,3711.89) R1.2@3891.97,3711.89 ; 3881.63,3686.94 ccw(c3856.68,3711.89) R1.2@3891.97,3711.89 ; R1.2@3884.03,3689.34 cw(c3905.59,3667.78) R1.2@3905.59,3698.27 ; R1.2@3884.03,3689.34 cw(c3905.59,3667.78) R1.2@3905.59,3698.27 ; R1.2@3884.03,3689.34 cw(c3905.59,3667.78) R1.2@3905.59,3698.27 ; C1.1@4215.53,3514.44 ccw(c4192.27,3537.69) 4225.16,3537.69 ; C1.1@4215.53,3514.44 ccw(c4192.27,3537.69) 4225.16,3537.69 ; C1.1@4215.53,3514.44 ccw(c4192.27,3537.69) 4225.16,3537.69 ; D1.2@4215.53,3562.3 cw(c4192.27,3539.04) 4225.16,3539.04 ; D1.2@4215.53,3562.3 cw(c4192.27,3539.04) 4225.16,3539.04 ; D1.2@4215.53,3562.3 cw(c4192.27,3539.04) 4225.16,3539.04 ; 4225.16,3537.69 ccw(c4258.04,3537.69) C1.1@4234.79,3514.44 ; 4225.16,3537.69 ccw(c4258.04,3537.69) C1.1@4234.79,3514.44 ; 4225.16,3537.69 ccw(c4258.04,3537.69) C1.1@4234.79,3514.44 ; 4225.16,3539.04 cw(c4258.04,3539.04) D1.2@4234.79,3562.3 ; 4225.16,3539.04 cw(c4258.04,3539.04) D1.2@4234.79,3562.3 ; 4225.16,3539.04 cw(c4258.04,3539.04) D1.2@4234.79,3562.3 ; D1.2@4225.16,3575.87 cw(c4264.35,3536.67) v1@4265.32,3592.09 ; D1.2@4225.16,3575.87 cw(c4264.35,3536.67) v1@4265.32,3592.09 ; D1.2@4225.16,3575.87 cw(c4264.35,3536.67) v1@4265.32,3592.09 ; D1.2@4225.16,3575.87 4243.39,3594.09 v1(4265.35,3594.09) ; D1.2@4233.74,3590.38 ccw(c4241.86,3600.39) D1.2@4248.3,3589.23 ; D1.2@4233.74,3590.38 ccw(c4241.86,3600.39) D1.2@4248.3,3589.23 ; D1.2@4233.74,3590.38 ccw(c4241.86,3600.39) D1.2@4248.3,3589.23 ; D1.2@4237.92,3575.05 cw(c4265.35,3564.82) v1(4265.35,3594.09) ; D1.2@4237.92,3575.05 cw(c4265.35,3564.82) v1(4265.35,3594.09) ; D1.2@4237.92,3575.05 cw(c4265.35,3564.82) v1(4265.35,3594.09) ; D1.2@4238.32,3576.28 cw(c4258.84,3570.78) D1.2@4248.21,3589.18 ; D1.2@4238.32,3576.28 cw(c4258.84,3570.78) D1.2@4248.21,3589.18 ; D1.2@4238.32,3576.28 cw(c4258.84,3570.78) D1.2@4248.21,3589.18 ; 4258.04,3500.87 cw(c4258.04,3533.75) 4234.79,3510.5 ccw(c4258.04,3533.75) 4258.04,3500.87 ; 4258.04,3500.87 ccw(c4258.04,3467.98) 4234.79,3491.23 cw(c4258.04,3467.98) 4258.04,3500.87 ; v3@4312.85,3595.42 ccw(c4299.19,3609.08) 4318.5,3609.08 ; v3@4312.85,3595.42 ccw(c4299.19,3609.08) 4318.5,3609.08 ; v3@4312.85,3595.42 ccw(c4299.19,3609.08) 4318.5,3609.08 ; 4318.5,3609.08 ccw(c4337.82,3609.08) v3@4324.16,3595.42 ; 4318.5,3609.08 ccw(c4337.82,3609.08) v3@4324.16,3595.42 ; 4318.5,3609.08 ccw(c4337.82,3609.08) v3@4324.16,3595.42 ; 4383.31,3638.9 ccw(c4363.55,3658.66) U4.2@4391.5,3658.66 ; 4383.31,3638.9 ccw(c4363.55,3658.66) U4.2@4391.5,3658.66 ; 4383.31,3638.9 ccw(c4363.55,3658.66) U4.2@4391.5,3658.66
  other v1: 3970.08,3361.81 3989.76,3361.81 4009.45,3361.81 3970.08,3381.5 3989.76,3381.5 4009.45,3381.5 3970.08,3401.18 3989.72,3401.18 4009.45,3401.18 3970.04,3420.87 3989.72,3420.87 4009.41,3420.87 3970.08,3440.55 3989.72,3440.55 4009.45,3440.55 3970.08,3460.24 3989.76,3460.24 4009.45,3460.24 3970.08,3479.92 3989.76,3479.92 4009.45,3479.92
ISN: C3.1 C9.1 C11.1 J1.3 J2.1 R3.1 R4.2 U1.22 U2.2 U3.5 U4.6 | length 7149.1
  Top Layer w6: R4.2@4475.87,2970.16 4475.87,3010.75 4450.39,3036.22 4450.39,3045.67 4454.61,3049.89 4496.78,3049.89 4522.71,3075.82 4522.71,3692.41 4521.04,3694.08
  Top Layer w10: U1.22@3999.57,3517.32 3999.57,3541.02 3948.28,3592.31 3948.28,3673.36 3986.23,3711.3 R3.1@4004.72,3711.3 C3.1@4079.72,3711.3 4123.83,3711.3 ; C3.1@4079.72,3721.3 C3.1@4084.72,3721.3 ; U4.6@4430.71,3574.02 4430.71,3603.54 v1(4487.87,3660.71) ; R3.1@4021.83,3698.13 cw(c4053.62,3666.34) C3.1@4053.62,3711.3 ; R3.1@4021.83,3698.13 cw(c4053.62,3666.34) C3.1@4053.62,3711.3 ; R3.1@4021.83,3698.13 cw(c4053.62,3666.34) C3.1@4053.62,3711.3 ; R3.1@4021.83,3724.47 ccw(c4053.62,3756.26) C3.1@4053.62,3711.3 ; R3.1@4021.83,3724.47 ccw(c4053.62,3756.26) C3.1@4053.62,3711.3 ; R3.1@4021.83,3724.47 ccw(c4053.62,3756.26) C3.1@4053.62,3711.3 ; R3.1@4023.93,3700.64 cw(c4038.96,3690.14) 4043.71,3707.85 ; R3.1@4023.93,3700.64 cw(c4038.96,3690.14) 4043.71,3707.85 ; R3.1@4023.93,3700.64 cw(c4038.96,3690.14) 4043.71,3707.85 ; R3.1@4023.93,3700.64 cw(c4038.96,3690.14) 4043.71,3707.85 ; R3.1@4023.93,3700.64 cw(c4038.96,3690.14) 4043.71,3707.85 ; R3.1@4023.93,3700.64 cw(c4038.96,3690.14) 4043.71,3707.85 ; R3.1@4023.93,3721.96 ccw(c4038.96,3732.46) 4043.71,3714.75 ; R3.1@4023.93,3721.96 ccw(c4038.96,3732.46) 4043.71,3714.75 ; R3.1@4023.93,3721.96 ccw(c4038.96,3732.46) 4043.71,3714.75 ; R3.1@4023.93,3721.96 ccw(c4038.96,3732.46) 4043.71,3714.75 ; R3.1@4023.93,3721.96 ccw(c4038.96,3732.46) 4043.71,3714.75 ; R3.1@4023.93,3721.96 ccw(c4038.96,3732.46) 4043.71,3714.75 ; R3.1@4024.79,3701.99 cw(c4046.76,3689.3) 4040.19,3713.81 ; R3.1@4024.79,3701.99 cw(c4046.76,3689.3) 4040.19,3713.81 ; R3.1@4024.79,3701.99 cw(c4046.76,3689.3) 4040.19,3713.81 ; R3.1@4024.79,3701.99 cw(c4046.76,3689.3) 4040.19,3713.81 ; R3.1@4024.79,3701.99 cw(c4046.76,3689.3) 4040.19,3713.81 ; R3.1@4024.79,3701.99 cw(c4046.76,3689.3) 4040.19,3713.81 ; R3.1@4024.79,3720.61 ccw(c4046.76,3733.29) 4040.19,3708.79 ; R3.1@4024.79,3720.61 ccw(c4046.76,3733.29) 4040.19,3708.79 ; R3.1@4024.79,3720.61 ccw(c4046.76,3733.29) 4040.19,3708.79 ; R3.1@4024.79,3720.61 ccw(c4046.76,3733.29) 4040.19,3708.79 ; R3.1@4024.79,3720.61 ccw(c4046.76,3733.29) 4040.19,3708.79 ; R3.1@4024.79,3720.61 ccw(c4046.76,3733.29) 4040.19,3708.79 ; R3.1@4030.83,3711.3 cw(c4030.83,3666.34) C3.1@4062.62,3698.13 ; R3.1@4030.83,3711.3 ccw(c4030.83,3756.26) C3.1@4062.62,3724.47 ; R3.1@4030.83,3711.3 cw(c4030.83,3666.34) C3.1@4062.62,3698.13 ; R3.1@4030.83,3711.3 ccw(c4030.83,3756.26) C3.1@4062.62,3724.47 ; R3.1@4030.83,3711.3 cw(c4030.83,3666.34) C3.1@4062.62,3698.13 ; R3.1@4030.83,3711.3 ccw(c4030.83,3756.26) C3.1@4062.62,3724.47 ; 4040.74,3707.85 cw(c4045.49,3690.14) C3.1@4060.52,3700.64 ; 4040.74,3707.85 cw(c4045.49,3690.14) C3.1@4060.52,3700.64 ; 4040.74,3707.85 cw(c4045.49,3690.14) C3.1@4060.52,3700.64 ; 4040.74,3714.75 ccw(c4045.49,3732.46) C3.1@4060.52,3721.96 ; 4040.74,3714.75 ccw(c4045.49,3732.46) C3.1@4060.52,3721.96 ; 4040.74,3714.75 ccw(c4045.49,3732.46) C3.1@4060.52,3721.96 ; 4044.26,3708.79 ccw(c4037.69,3733.29) C3.1@4059.66,3720.61 ; 4044.26,3708.79 ccw(c4037.69,3733.29) C3.1@4059.66,3720.61 ; 4044.26,3708.79 ccw(c4037.69,3733.29) C3.1@4059.66,3720.61 ; 4044.26,3713.81 cw(c4037.69,3689.3) C3.1@4059.66,3701.99 ; 4044.26,3713.81 cw(c4037.69,3689.3) C3.1@4059.66,3701.99 ; 4044.26,3713.81 cw(c4037.69,3689.3) C3.1@4059.66,3701.99 ; C3.1@4097.87,3699.27 cw(c4123.83,3677.28) 4123.83,3711.3 ; C3.1@4097.87,3699.27 cw(c4123.83,3677.28) 4123.83,3711.3 ; C3.1@4097.87,3699.27 cw(c4123.83,3677.28) 4123.83,3711.3 ; C3.1@4097.87,3723.33 ccw(c4123.83,3745.32) 4123.83,3711.3 ; C3.1@4097.87,3723.33 ccw(c4123.83,3745.32) 4123.83,3711.3 ; C3.1@4097.87,3723.33 ccw(c4123.83,3745.32) 4123.83,3711.3 ; 4123.83,3711.3 4171.45,3758.91 4456.2,3758.91 4521.04,3694.08 ; U4.6@4425.89,3588.67 ccw(c4414.27,3600.3) 4430.71,3600.3 ; U4.6@4425.89,3588.67 ccw(c4414.27,3600.3) 4430.71,3600.3 ; U4.6@4425.89,3588.67 ccw(c4414.27,3600.3) 4430.71,3600.3 ; 4430.71,3600.3 ccw(c4447.15,3600.3) U4.6@4435.52,3588.67 ; 4430.71,3600.3 ccw(c4447.15,3600.3) U4.6@4435.52,3588.67 ; 4430.71,3600.3 ccw(c4447.15,3600.3) U4.6@4435.52,3588.67 ; 4475.92,3648.76 cw(c4487.87,3636.81) v1@4487.87,3653.71 ; 4475.92,3648.76 ccw(c4463.97,3660.71) v1@4480.87,3660.71 ; 4475.92,3648.76 cw(c4487.87,3636.81) v1@4487.87,3653.71 ; 4475.92,3648.76 ccw(c4463.97,3660.71) v1@4480.87,3660.71 ; 4475.92,3648.76 cw(c4487.87,3636.81) v1@4487.87,3653.71 ; 4475.92,3648.76 ccw(c4463.97,3660.71) v1@4480.87,3660.71 ; 4484.66,3730.45 ccw(c4515.43,3761.22) v1@4515.43,3717.71 ; 4484.66,3730.45 ccw(c4515.43,3761.22) v1@4515.43,3717.71 ; 4484.66,3730.45 ccw(c4515.43,3761.22) v1@4515.43,3717.71 ; 4501.74,3713.38 ccw(c4515.43,3727.08) v1@4515.43,3707.71 ; 4501.74,3713.38 ccw(c4515.43,3727.08) v1@4515.43,3707.71 ; 4501.74,3713.38 ccw(c4515.43,3727.08) v1@4515.43,3707.71 ; v1@4520.67,3706.07 ccw(c4527.23,3700.27) 4521.04,3694.08 ; v1@4520.67,3706.07 ccw(c4527.23,3700.27) 4521.04,3694.08 ; v1@4520.67,3706.07 ccw(c4527.23,3700.27) 4521.04,3694.08
  Top Layer w12: U3.5@3535.04,2833.07 3535.04,2805.51 3544.68,2795.87 ; C11.1@3648.82,2812.2 3632.48,2795.87 3544.68,2795.87 ; U3.5@3529.43,2825.85 ccw(c3543.76,2819.15) 3532.58,2807.97 ; U3.5@3529.43,2825.85 ccw(c3543.76,2819.15) 3532.58,2807.97 ; U3.5@3529.43,2825.85 ccw(c3543.76,2819.15) 3532.58,2807.97 ; U3.5@3530.93,2819.12 cw(c3521.01,2809.2) 3535.04,2809.2 ; U3.5@3530.93,2819.12 cw(c3521.01,2809.2) 3535.04,2809.2 ; U3.5@3530.93,2819.12 cw(c3521.01,2809.2) 3535.04,2809.2 ; 3535.04,2809.2 cw(c3549.07,2809.2) U3.5@3539.15,2819.12 ; 3535.04,2809.2 cw(c3549.07,2809.2) U3.5@3539.15,2819.12 ; 3535.04,2809.2 cw(c3549.07,2809.2) U3.5@3539.15,2819.12 ; U3.5@3540.3,2820.77 ccw(c3560.26,2811.44) 3544.68,2795.87 ; U3.5@3540.3,2820.77 ccw(c3560.26,2811.44) 3544.68,2795.87 ; U3.5@3540.3,2820.77 ccw(c3560.26,2811.44) 3544.68,2795.87 ; 3562.89,2795.87 ccw(c3562.89,2894.19) C11.1@3632.42,2824.67 ; 3562.89,2795.87 ccw(c3562.89,2894.19) C11.1@3632.42,2824.67 ; 3562.89,2795.87 ccw(c3562.89,2894.19) C11.1@3632.42,2824.67 ; 3591.86,2795.87 ccw(c3591.86,2865.22) C11.1@3640.91,2816.18 ; 3591.86,2795.87 ccw(c3591.86,2865.22) C11.1@3640.91,2816.18 ; 3591.86,2795.87 ccw(c3591.86,2865.22) C11.1@3640.91,2816.18 ; 3596.99,2804.17 cw(c3611.79,2778.59) C11.1@3632.52,2799.65 ; 3596.99,2804.17 cw(c3611.79,2778.59) C11.1@3632.52,2799.65 ; 3596.99,2804.17 cw(c3611.79,2778.59) C11.1@3632.52,2799.65 ; 3610.62,2812.05 cw(c3623.25,2790.23) C11.1@3640.94,2808.2 ; 3610.62,2812.05 cw(c3623.25,2790.23) C11.1@3640.94,2808.2 ; 3610.62,2812.05 cw(c3623.25,2790.23) C11.1@3640.94,2808.2 ; 3612.53,2799.8 cw(c3622.18,2783.08) C11.1@3634.05,2798.31 ; 3612.53,2799.8 cw(c3622.18,2783.08) C11.1@3634.05,2798.31 ; 3612.53,2799.8 cw(c3622.18,2783.08) C11.1@3634.05,2798.31 ; 3616.68,2802.19 ccw(c3604.68,2822.98) C11.1@3627.86,2816.77 ; 3616.68,2802.19 ccw(c3604.68,2822.98) C11.1@3627.86,2816.77 ; 3616.68,2802.19 ccw(c3604.68,2822.98) C11.1@3627.86,2816.77 ; 3620.84,2795.87 ccw(c3620.84,2836.25) C11.1@3649.39,2807.69 ; 3620.84,2795.87 ccw(c3620.84,2836.25) C11.1@3649.39,2807.69 ; 3620.84,2795.87 ccw(c3620.84,2836.25) C11.1@3649.39,2807.69
  Top Layer w25: v2@3707.48,3023.23 3762.99,3078.74 U2.2@3762.99,3089.76 ; 3761.02,2859.06 3763.07,2861.1 ; U2.2@3763.07,3083.54 3763.07,3108.17 3815.04,3160.14 C9.1@3815.04,3163.07 ; J1.3@3959.84,2766.34 3959.84,2857.87 3963.39,2861.42 ; v2@3695.67,3024.9 ccw(c3695.67,3057.46) 3718.69,3034.44 ; v2@3695.67,3024.9 ccw(c3695.67,3057.46) 3718.69,3034.44 ; v2@3695.67,3024.9 ccw(c3695.67,3057.46) 3718.69,3034.44 ; v2@3700.19,3017.08 cw(c3725.99,3002.18) 3718.28,3030.96 ; v2@3700.19,3017.08 cw(c3725.99,3002.18) 3718.28,3030.96 ; v2@3700.19,3017.08 cw(c3725.99,3002.18) 3718.28,3030.96 ; 3749.38,3065.13 cw(c3762.99,3051.52) U2.2@3762.99,3070.77 ; 3749.38,3065.13 cw(c3762.99,3051.52) U2.2@3762.99,3070.77 ; 3749.38,3065.13 cw(c3762.99,3051.52) U2.2@3762.99,3070.77 ; 3787.26,3132.35 ccw(c3756.54,3163.07) C9.1@3799.98,3163.07 ; 3787.26,3132.35 ccw(c3756.54,3163.07) C9.1@3799.98,3163.07 ; 3787.26,3132.35 ccw(c3756.54,3163.07) C9.1@3799.98,3163.07 ; J1.3@3936.86,2789.32 ccw(c3881.38,2844.8) 3959.84,2844.8 ; J1.3@3936.86,2789.32 ccw(c3881.38,2844.8) 3959.84,2844.8 ; J1.3@3936.86,2789.32 ccw(c3881.38,2844.8) 3959.84,2844.8 ; 3959.84,2844.8 ccw(c4038.3,2844.8) J1.3@3982.82,2789.32 ; 3959.84,2844.8 ccw(c4038.3,2844.8) J1.3@3982.82,2789.32 ; 3959.84,2844.8 ccw(c4038.3,2844.8) J1.3@3982.82,2789.32
  Top Layer w50: J2.1@3301.12,3115.85 3522.09,2894.88 3587.93,2894.88 3625.73,2857.09 ; v2(3625.73,2961.95) 3625.73,2857.09 ; 3688.58,2857.09 3625.73,2857.09 ; 3625.73,2855.11 ccw(c3687.79,2855.11) C11.1@3643.91,2811.23 ; 3625.73,2855.11 ccw(c3687.79,2855.11) C11.1@3643.91,2811.23 ; 3625.73,2855.11 ccw(c3687.79,2855.11) C11.1@3643.91,2811.23 ; 3625.73,2855.11 ccw(c3687.79,2855.11) C11.1@3643.91,2811.23 ; 3625.73,2855.11 ccw(c3687.79,2855.11) C11.1@3643.91,2811.23 ; 3625.73,2855.11 ccw(c3687.79,2855.11) C11.1@3643.91,2811.23 ; 3629.04,2853.78 cw(c3587.47,2812.2) C11.1@3646.26,2812.2 ; 3629.04,2853.78 cw(c3587.47,2812.2) C11.1@3646.26,2812.2 ; 3629.04,2853.78 cw(c3587.47,2812.2) C11.1@3646.26,2812.2 ; 3629.04,2853.78 cw(c3587.47,2812.2) C11.1@3646.26,2812.2 ; 3629.04,2853.78 cw(c3587.47,2812.2) C11.1@3646.26,2812.2 ; 3629.04,2853.78 cw(c3587.47,2812.2) C11.1@3646.26,2812.2
  Bottom Layer w10: v1(4487.87,3660.71) 4515.43,3688.27 v1(4515.43,3710.71) ; v1@4487.87,3667.71 ccw(c4487.87,3684.61) 4499.82,3672.66 ; v1@4487.87,3667.71 ccw(c4487.87,3684.61) 4499.82,3672.66 ; v1@4487.87,3667.71 ccw(c4487.87,3684.61) 4499.82,3672.66 ; v1@4494.87,3660.71 cw(c4511.77,3660.71) 4499.82,3672.66 ; v1@4494.87,3660.71 cw(c4511.77,3660.71) 4499.82,3672.66 ; v1@4494.87,3660.71 cw(c4511.77,3660.71) 4499.82,3672.66 ; v1@4510.48,3705.76 cw(c4498.53,3693.81) 4515.43,3693.81 ; v1@4510.48,3705.76 cw(c4498.53,3693.81) 4515.43,3693.81 ; v1@4510.48,3705.76 cw(c4498.53,3693.81) 4515.43,3693.81 ; 4515.43,3693.81 cw(c4532.33,3693.81) v1@4520.38,3705.76 ; 4515.43,3693.81 cw(c4532.33,3693.81) v1@4520.38,3705.76 ; 4515.43,3693.81 cw(c4532.33,3693.81) v1@4520.38,3705.76
  Bottom Layer w25: v2(3625.73,2961.95) 3683.46,3019.68 v2(3695.67,3019.68) ; 3665.93,3002.15 cw(c3695.67,2972.41) v2@3695.67,3014.47 ; 3665.93,3002.15 cw(c3695.67,2972.41) v2@3695.67,3014.47 ; 3665.93,3002.15 cw(c3695.67,2972.41) v2@3695.67,3014.47